# EAGLE board ext_esp_wroom_32 (EAGLE 9.6.2)
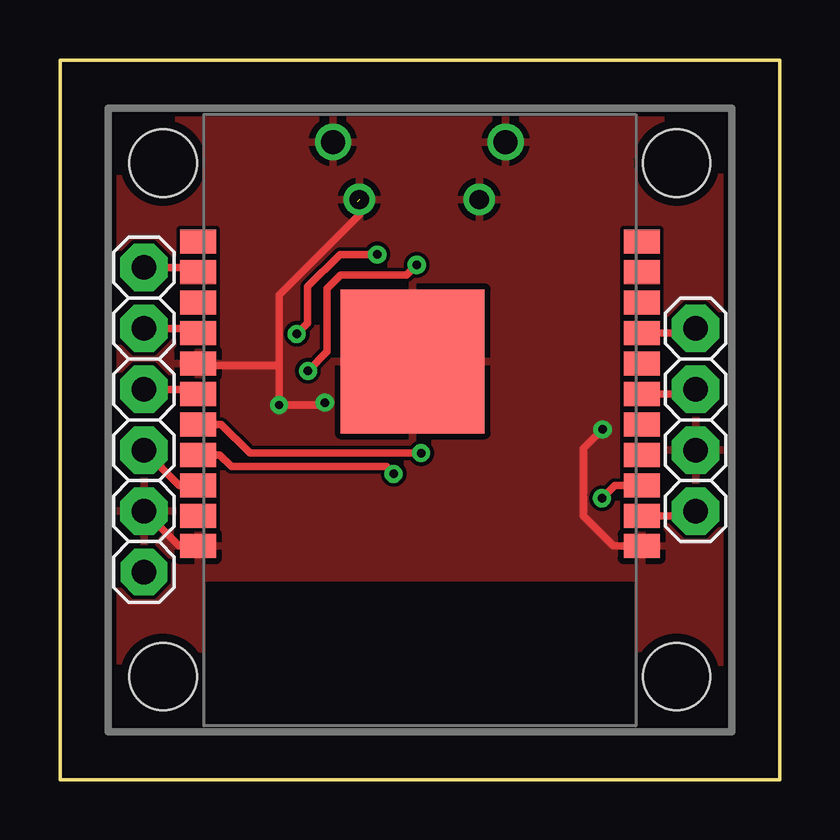
[diagram p0: board, top side]
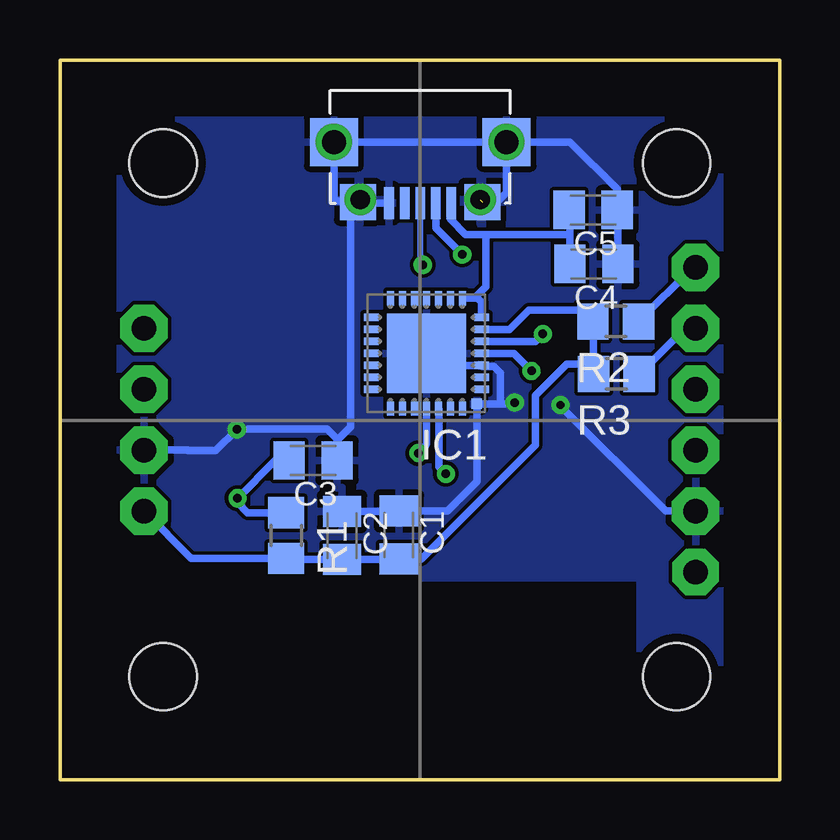
[diagram p1: board, bottom side, seen from below]

Size 30 x 30 mm. Coordinates in mm from the lower left corner, seen from the top.
Outline: 0,0 0,30 30,30 30,0 0,0
Copper layers (1*16): Top 0.035mm / dielectric 1.5mm / Bottom 0.035mm
Design rules "default *": minimum track width 10mil, minimum drill 0.35mm, track to track 6mil, track to pad 6mil, pad to pad 6mil, via to via 6mil, smd to smd 6mil, copper to edge 15mil, drill to drill 15mil, minimum pad ring 10mil, minimum via ring 8mil, stop-mask expansion 4mil, vias tented up to drill 0mil, thermal gap 10mil
Holes 2.8 mm at 4.3,4.3 25.7,25.7 25.7,4.3 4.3,25.7

## Footprints (pad centres in the part's own frame; a part is rotated, then mirrored left to right if it is on the bottom)
C0805K = smd 1.3 x 1.6: 1 -1,0; 2 1,0
MLP28 = smd 0.6 x 0.3: 1 -2.3,1.5; 2 -2.3,1; 3 -2.3,0.5; 4 -2.3,0; 5 -2.3,-0.5; 6 -2.3,-1; 7 -2.3,-1.5; 15 2.3,-1.5; 16 2.3,-1; 17 2.3,-0.5; 18 2.3,0; 19 2.3,0.5; 20 2.3,1; 21 2.3,1.5 | smd 0.3 x 0.6: 8 -1.5,-2.3; 9 -1,-2.3; 10 -0.5,-2.3; 11 0,-2.3; 12 0.5,-2.3; 13 1,-2.3; 14 1.5,-2.3; 22 1.5,2.3; 23 1,2.3; 24 0.5,2.3; 25 0,2.3; 26 -0.5,2.3; 27 -1,2.3; 28 -1.5,2.3 | smd 3.3 x 3.3: EXP 0,0 | smd 0.435 x 0.435: M -2.103,2.103
1X04 = drill 1.016 pad 1.981 octagon: 1 -3.81,0; 2 -1.27,0; 3 1.27,0; 4 3.81,0
1X06 = drill 1.016 pad 1.93 octagon: 1 -6.35,0 | drill 1.016 pad 1.981 octagon: 2 -3.81,0; 3 -1.27,0; 4 1.27,0; 5 3.81,0; 6 6.35,0
R0805 = smd 1.3 x 1.5: 1 -0.95,0; 2 0.95,0
ESP-WROOM-32-TINY-BLOCK = smd 1.5 x 1: 1 -9.25,8.27; 2 -9.25,7; 3 -9.25,5.73; 4 -9.25,4.46; 5 -9.25,3.19; 6 -9.25,1.92; 7 -9.25,0.65; 8 -9.25,-0.62; 9 -9.25,-1.89; 10 -9.25,-3.16; 11 -9.25,-4.43; 28 9.25,-4.43; 29 9.25,-3.16; 30 9.25,-1.89; 31 9.25,-0.62; 32 9.25,0.65; 33 9.25,1.92; 34 9.25,3.19; 35 9.25,4.46; 36 9.25,5.73; 37 9.25,7; 38 9.25,8.27 | smd 6 x 6: GND 0.3,0.57
MICROUSB-MOLEX = smd 0.4 x 1.35: D+ 0,2.35; D- -0.65,2.35; GND 1.3,2.35; NC 0.65,2.35; VUSB -1.3,2.35 | smd 2 x 2: GND1 -3.6,-0.2; GND2 3.6,-0.2 | smd 1.5 x 1.5: GND3 -2.59,2.3; GND4 2.6,2.3 | drill 1: P$1 -3.6,-0.2; P$2 3.6,-0.2 | drill 0.8: P$3 -2.5,2.2; P$6 2.5,2.2

## Placement (x,y rotation side)
C1  100n  [C0805K]  15.87,10.2 270 bottom
C2  10u  [C0805K]  18.24,10.17 270 bottom
C3  100n  [C0805K]  19.45,13.3 180 bottom
C4  100n  [C0805K]  7.74,21.49 180 bottom
C5  10u  [C0805K]  7.77,23.74 180 bottom
IC1  CP2102  [MLP28]  14.72,17.77 180 bottom
JP1  [1X04]  26.5,15 270 top
JP2  [1X06]  3.5,15 90 top
R1  10k  [R0805]  20.57,10.17 270 bottom
R2  2k2  [R0805]  6.83,19.09 180 bottom
R3  2k2  [R0805]  6.8,16.91 180 bottom
U$1  ESP-WROOM-32-TINY-BLOCK  [ESP-WROOM-32-TINY-BLOCK]  15,18 180 top
USB  USBMICRO  [MICROUSB-MOLEX]  14.98,26.38 180 bottom

## Library data of the parts
C1-C5 = rcl; SPICEPREFIX: C
IC1 = silabs; MF: FARNELL; MPN: CP2102-GM; OC_FARNELL: 9282130; OC_NEWARK: 30K5635
JP1 JP2 = pinhead2
R1-R3 = rcl; SPICEPREFIX: R
U$1 = esp32
USB = !stavebnice03

## Nets
EN: C3.2 R1.1 U$1.3
GND: C1.1 C2.1 C3.1 C4.1 C5.1 IC1.3 IC1.EXP IC1.M JP1.3 JP2.2 U$1.1 U$1.32 U$1.38 U$1.GND USB.GND USB.GND1 USB.GND2 USB.GND3 USB.GND4 USB.P$1 USB.P$2 USB.P$3 USB.P$6
N$1: IC1.5 USB.D-
N$2: IC1.4 USB.D+
N$4: IC1.26 U$1.35
N$6: IC1.25 U$1.34
N$12: C4.2 C5.2 IC1.7 IC1.8 USB.VUSB
P0: JP1.2 U$1.6
P1: JP1.1 U$1.8
P4: JP2.3 U$1.36
SCL: JP2.5 R3.1 U$1.31
SDA: JP2.6 R2.1 U$1.29
UPDI: JP2.4 U$1.33
VCC: C1.2 C2.2 IC1.6 JP1.4 R1.2 R2.2 R3.2 U$1.2

## Tracks (layer width: path | path; a pad name or v marks a point on that pad's centre or on a via)
EN  (via drill 0.35)
  Top 0.305: U$1.3 23.14,12.27 v22.6,11.73
  Bottom 0.305: R1.1 22.17,11.12 22.6,11.55 v22.6,11.73 21.02,13.3 C3.2
GND  (via drill 0.35)  (1 unrouted)
  Top 0.305: JP2.2 4.96,9.73 U$1.38 | v11.04,15.72 10.94,15.61 v9.14,15.61 | U$1.1 23.07,9.73 21.82,10.98 21.82,13.8 v22.62,14.6 | 9.11,15.64 v9.14,15.61 | v9.14,15.61 9.14,17.27 | 9.14,17.27 9.14,20.2 12.48,23.55 USB.P$3 | 9.14,17.27 5.83,17.27 U$1.32
  Bottom 0.305: 3.88,11.19 JP2.2 4.75,11.19 9.14,15.58 v9.14,15.61 | USB.GND1 USB.P$2 18.58,24.24 18.44,24.11 17.61,24.11 USB.GND4 17.53,24.03 USB.GND 17.33,24.03 USB.P$6 17.88,23.78 17.88,14.71 18.45,14.14 C3.1 18.45,14.2 18.87,14.62 22.16,14.62 v22.62,14.6 23.51,13.71 24.68,13.71 24.66,13.73 JP1.3 | C2.1 15.9,11.17 C1.1 13.84,11.2 12.62,12.42 IC1.M 11.63,15.67 | C4.1 6.74,23.72 C5.1 6.77,24.61 8.74,26.58 USB.GND1 | USB.P$3 11.67,24.18 11.38,24.47 USB.GND1 | 11.63,15.67 11.09,15.67 v11.04,15.72 | 11.63,15.67 11.63,16.95 11.91,17.22 12.38,17.22 IC1.3 14.22,17.27 IC1.EXP
  pour Top: 2.5,27.5 27.5,27.5 27.5,2.5 2.5,2.5
  pour Bottom: 2.5,27.5 27.5,27.5 27.5,2.5 2.5,2.5
N$1  (via drill 0.35)
  Top 0.305: 13.33,21.94 13.28,21.89 v13.23,21.89 11.68,21.89 10.33,20.54 10.33,19.04 v9.87,18.58
  Bottom 0.305: v9.87,18.58 10.18,18.27 IC1.5 | USB.D- 14.33,22.99 v13.23,21.89
N$2  (via drill 0.35)
  Top 0.305: v14.88,21.46 14.45,21.02 11.7,21.02 11.14,20.47 11.14,17.84 v10.34,17.03
  Bottom 0.254: USB.D+ 14.98,21.56 v14.88,21.46
  Bottom 0.305: USB.D+ 14.95,24 | v10.34,17.03 11.08,17.77 IC1.4
N$4  (via drill 0.35)
  Top 0.305: U$1.35 6.67,13.54 7.16,13.05 13.61,13.05 v13.91,12.74
  Bottom 0.305: IC1.26 14.2,15.44 14.2,13.03 v13.91,12.74
N$6  (via drill 0.35)
  Top 0.305: v15.06,13.61 7.92,13.61 6.72,14.81 U$1.34
  Bottom 0.305: IC1.25 14.72,13.99 14.78,13.88 v15.06,13.61
N$12
  Bottom 0.305: IC1.8 12.59,20.07 12.42,19.9 IC1.7 | IC1.8 12.79,20.07 | C5.2 8.74,23.72 8.74,22.7 | 8.74,22.7 C4.2 | 8.74,22.7 8.77,22.73 12.24,22.73 | USB.VUSB 13.72,23.98 13.72,23.36 13.1,22.73 12.24,22.73 | IC1.8 12.71,20.07 12.24,20.54 12.24,22.73
P0
  Top 0.305: U$1.6 26.31,16.08 JP1.2
P1
  Top 0.305: U$1.8 26.31,18.62 JP1.1
P4
  Top 0.305: JP2.3 4.96,12.27 U$1.36
SCL
  Top 0.305: JP2.5 5.56,18.81 U$1.31
  Bottom 0.305: JP2.5 3.95,18.81 R3.1
SDA
  Top 0.305: JP2.6 5.56,21.35 U$1.29
  Bottom 0.305: R2.1 3.62,21.35 JP2.6
UPDI
  Top 0.305: JP2.4 5.56,16.27 U$1.33
VCC
  Top 0.305: U$1.2 26.31,11 JP1.4
  Bottom 0.305: JP1.4 24.53,9.22 R1.2 20.52,9.17 C2.2 15.9,9.17 C1.2 14.92,9.2 10.18,13.94 10.18,16.01 8.86,17.33 8.17,17.33 R3.2 7.75,19.07 R2.2 8.26,19.58 10.46,19.58 11.27,18.77 IC1.6

## Text on the board
bDocu: GND | GND | VCC | VCC